# Altium PCB LegBoard.PcbDoc
Units mil, origin at the board's own origin, x right, y up, seen from the top; angles counter-clockwise.
Board outline 4000 x 2200 mil, 4 copper layers (Top Layer, Internal Plane 1, Internal Plane 2, Bottom Layer), stack 30.634 mil thick; 97 components, 72 nets, 402 pads, 149 vias.
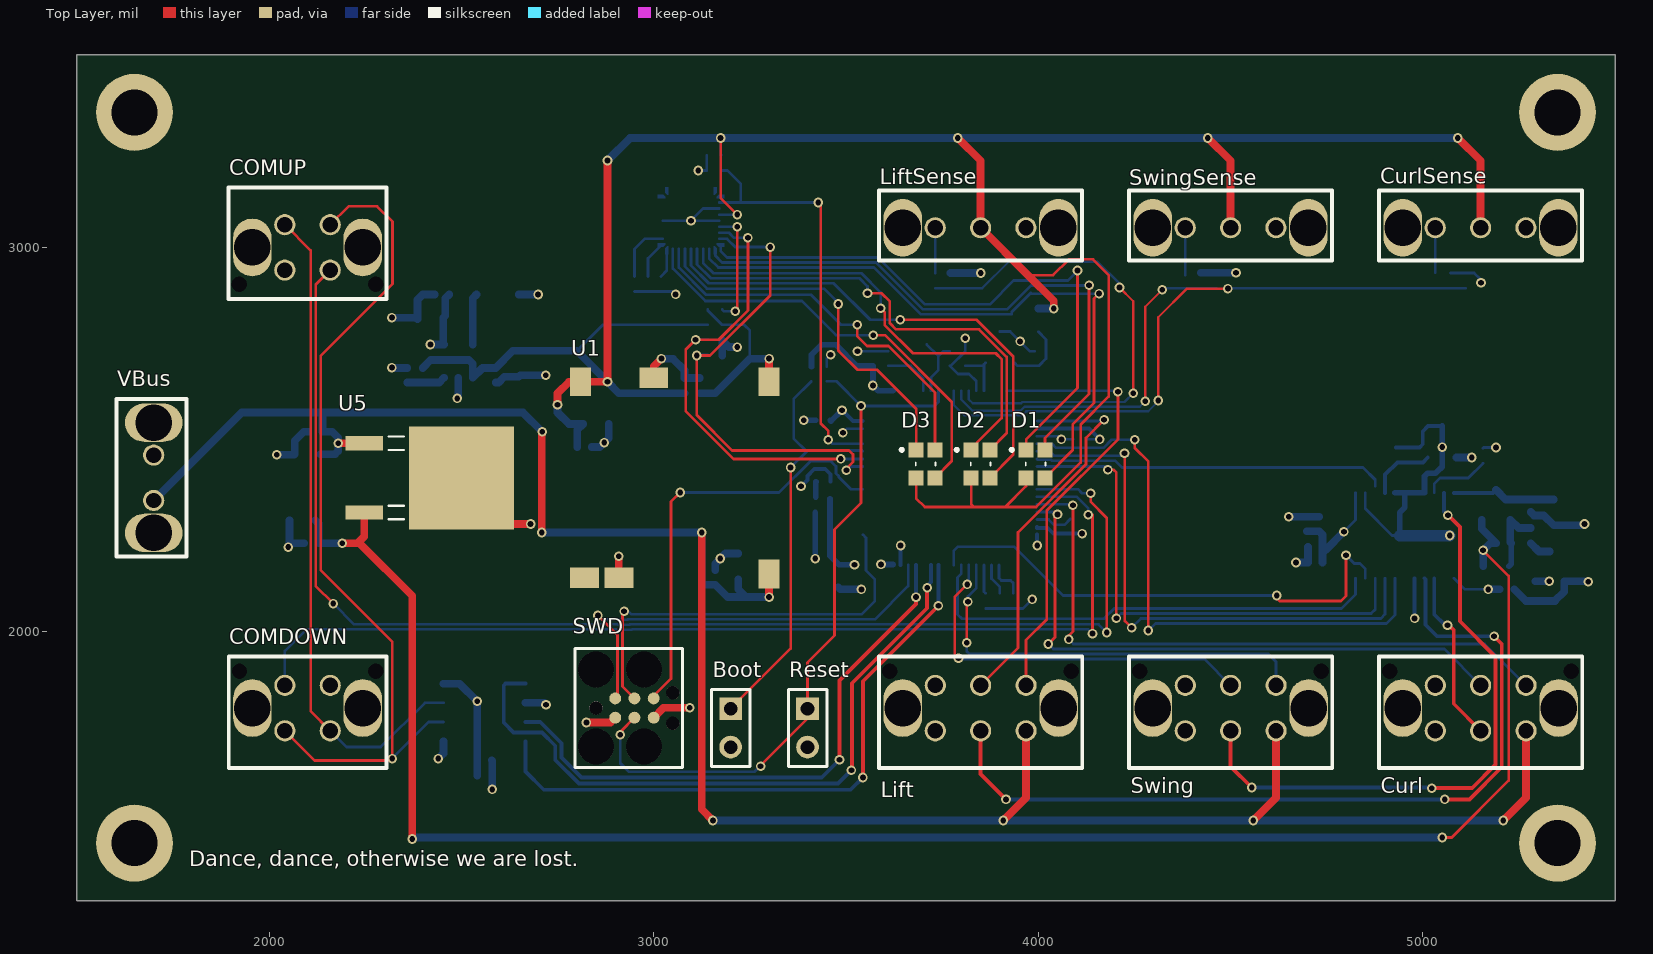
[diagram p0: Top Layer view]
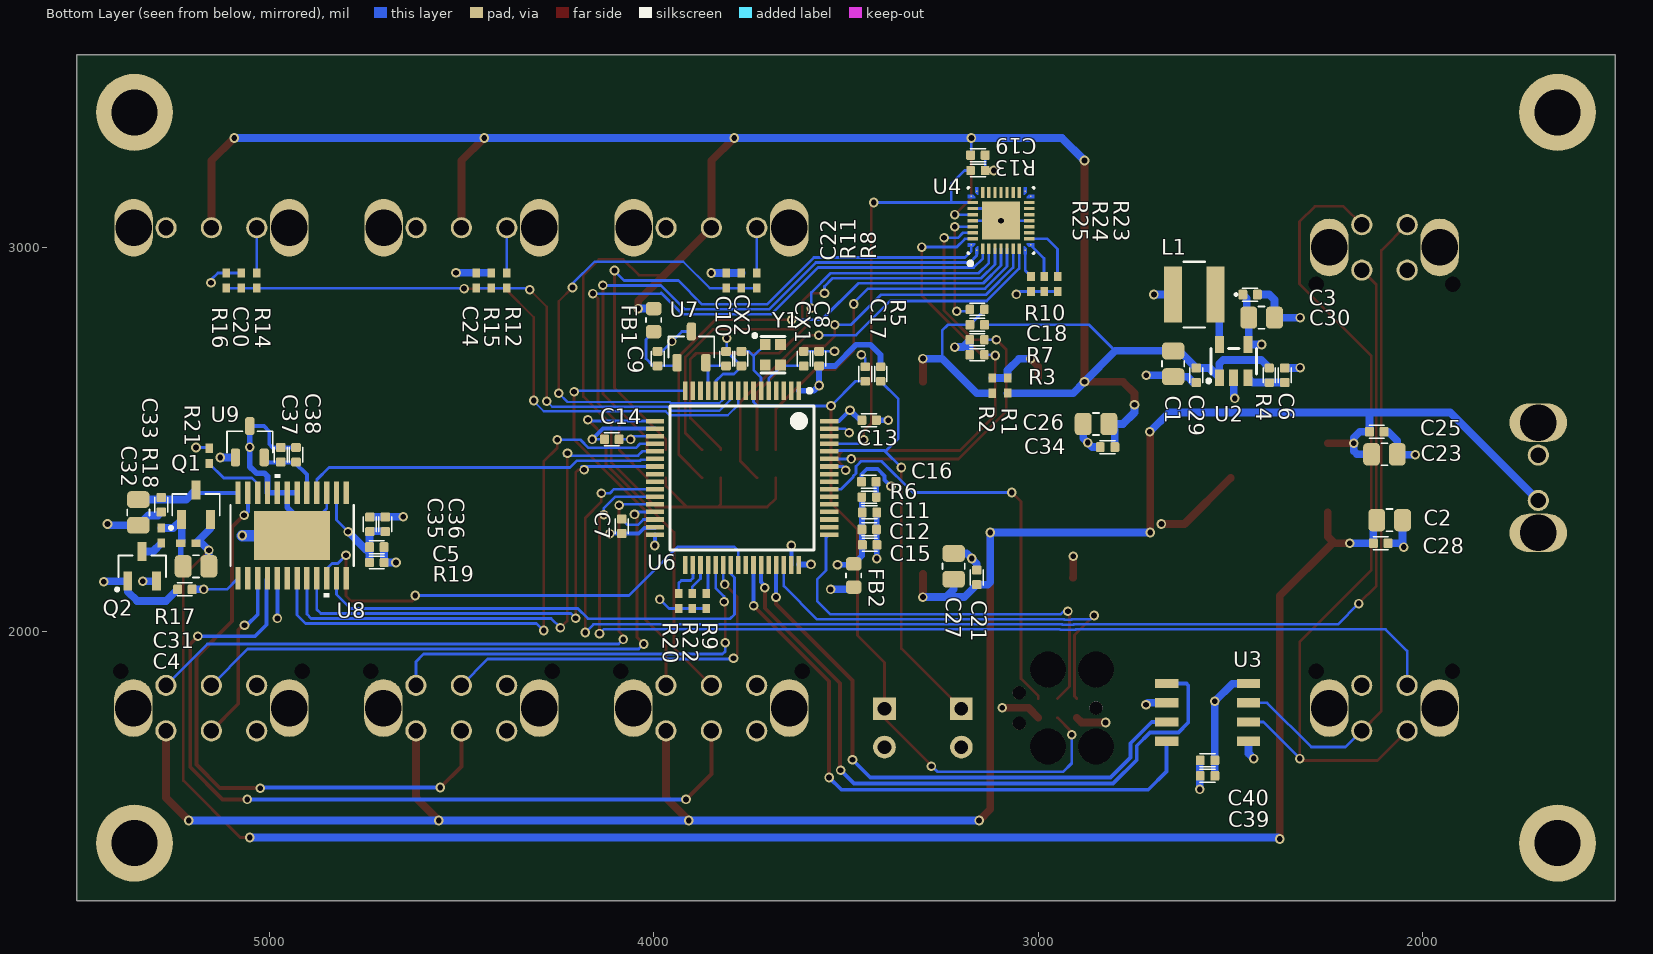
[diagram p1: Bottom Layer view, seen from below]
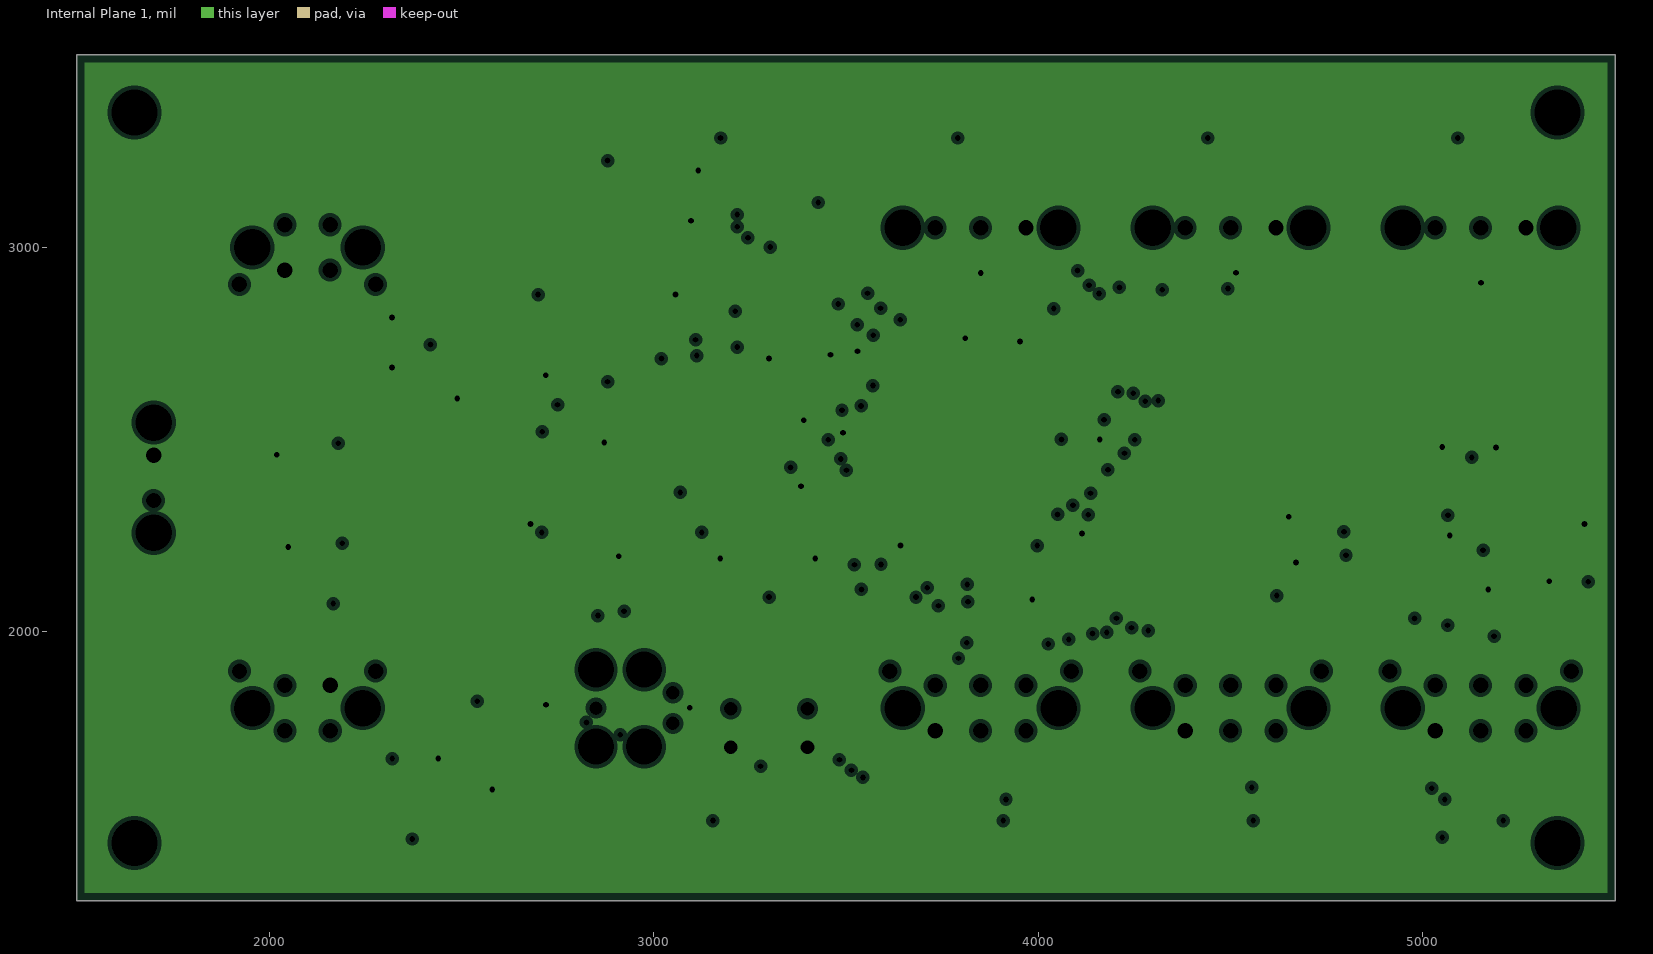
[diagram p2: Internal Plane 1, clearances drawn from the general rule]
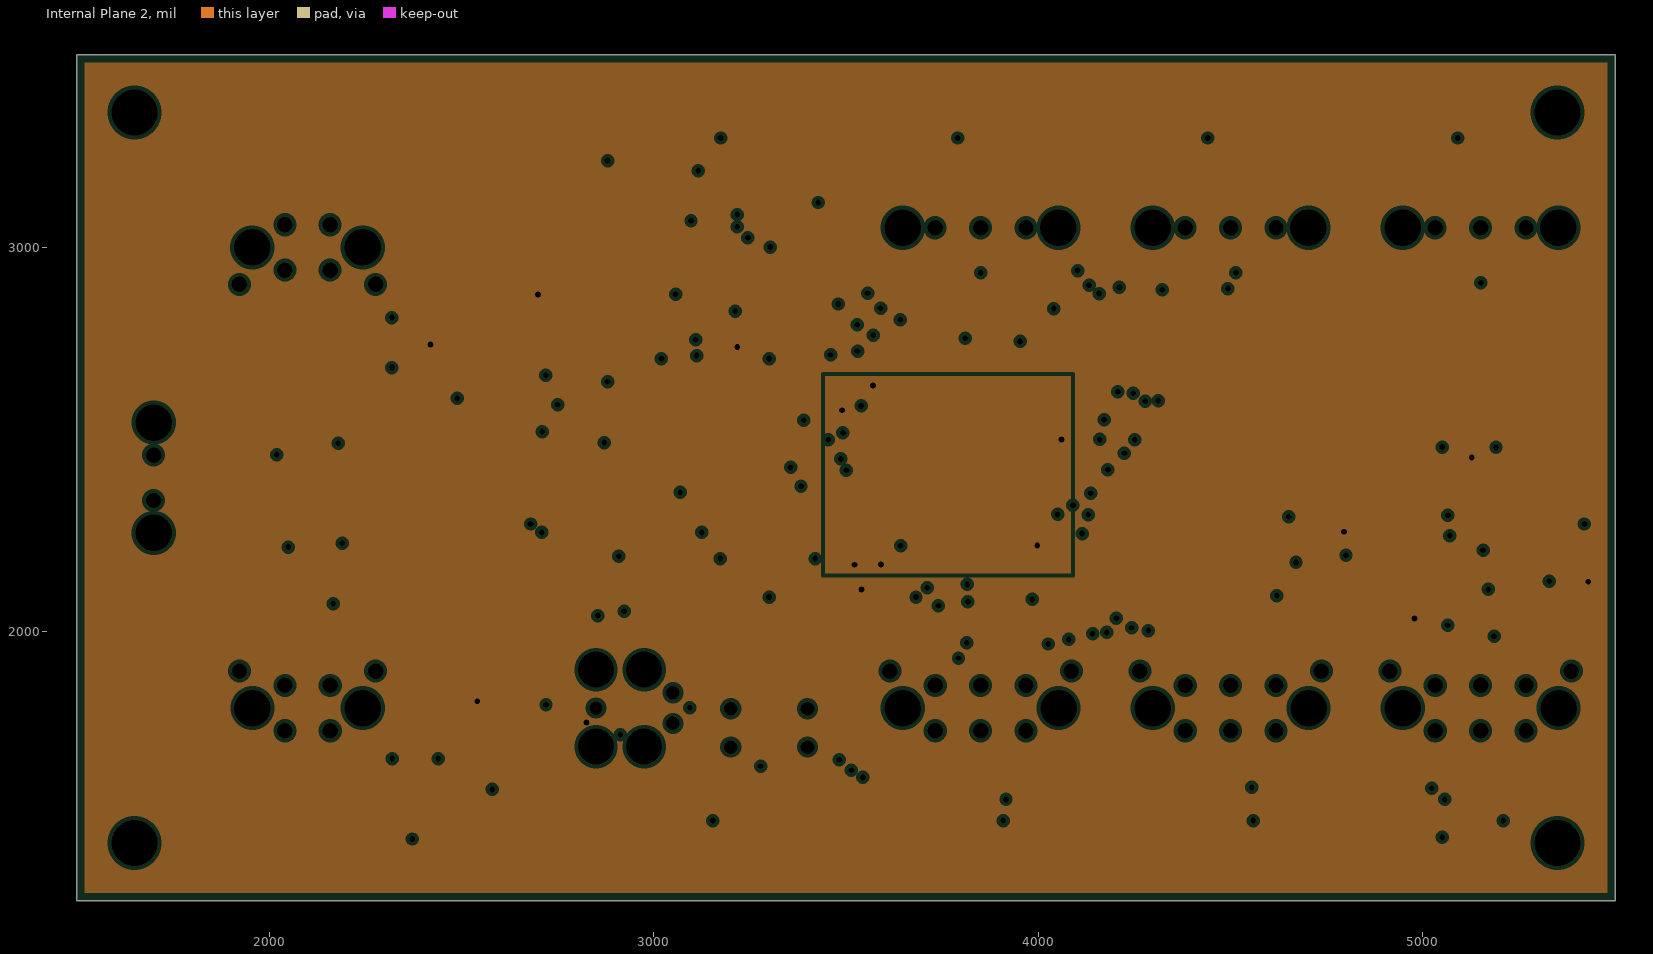
[diagram p3: Internal Plane 2, clearances drawn from the general rule]
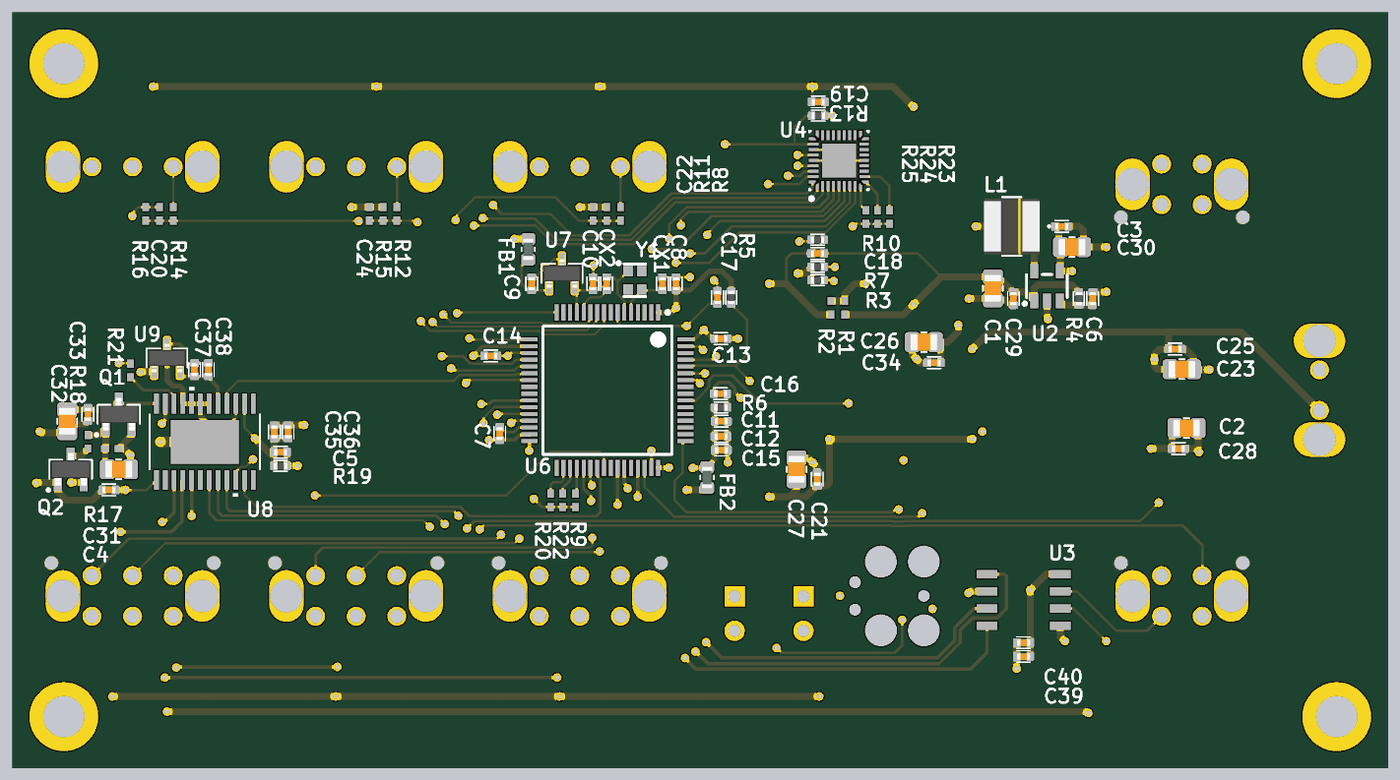
[diagram p4: 3D render of the assembled board from below, using the file's embedded part models]

## Layer stack, top to bottom
Top Solder: solder mask 0.4, Solder Resist, Dk 3.5
Top Layer: signal copper 1.4
Dielectric 1: core 10, FR-4, Dk 4.2
Internal Plane 1: plane copper 1.417, net GND
Dielectric 3: prepreg 5, Dk 4.2
Internal Plane 2: plane copper 1.417, net (Multiple Nets)
Dielectric 2: core 10, Dk 4.2
Bottom Layer: signal copper 1.4
Bottom Solder: solder mask 0.4, Solder Resist, Dk 3.5

## Board outline
1500,1300 5500,1300 5500,3500 1500,3500

## Design rules (kind name [scope] priority, off if disabled: settings)
Clearance [All] p1: gap=6 ignorepadtopadclearanceinfootprint=FALSE
HoleSize [All] p1: absolutevalues=TRUE maxlimit=1000 minlimit=1 maxpercent=80.000 minpercent=20.000
MinimumSolderMaskSliver [All] p1: minsoldermaskwidth=0
PlaneClearance [All] p1: clearance=10
PlaneConnect [All] p1: planeconnectstyle=Relief reliefexpansion=10 reliefentries=4 reliefconductorwidth=10 reliefairgap=6
PolygonConnect [All] p1: connectstyle=Relief reliefconductorwidth=10 reliefentries=4 polygonreliefangle="90 Angle" airgapwidth=10
RoutingVias [All] p1: holewidth=28 width=50 viastyle="Through Hole" minholewidth=28 minwidth=50 maxholewidth=28 maxwidth=50
SilkToSilkClearance [All] p1: silktosilkclearance=0
SilkToSolderMaskClearance [IsPad] p1: minsilkscreentomaskgap=0 clearancetoexposedcopper=TRUE
SolderMaskExpansion [All] p1: expansion=4
Width [All] p1: maxlimit=5000 minlimit=6 preferedwidth=10
24 further rules are at their usual default settings.

## Classes and differential pairs
component class uController: Boot C7 C8 C9 C10 C11 C12 C13 C14 C15 C16 C17 C39 C40 CX1 CX2 FB1 FB2 R3 R5 R6 R7 R9 R20 R22 Reset U3 U6 U7 Y1
component class Power: C1 C2 C3 C6 C21 C23 C25 C26 C27 C28 C29 C30 C34 L1 R1 R2 R4 U1 U2 U5
component class Connectors: COMDOWN COMUP Curl CurlSense Lift LiftSense SWD Swing SwingSense VBus
component class Analog: C4 C5 C20 C22 C24 C31 C32 C33 C35 C36 C37 C38 Q1 Q2 R8 R11 R12 R14 R15 R16 R17 R18 R19 R21 U8 U9
component class LEDs: C18 C19 D1 D2 D3 R10 R13 R23 R24 R25 U4

## Components (designator, comment, footprint, x,y, rotation, side; value= is the part's Value field where it differs from the comment)
Boot "Header 2" HDR1X2 3200,1800 r270 top
C1 "10uF" CAPC2012X145N 2649.4,2696.61 r270 bottom
C2 "10uF" CAPC2012X145N 2086.54,2290 r180 bottom
C3 "0.1uF" CAPC1005(0402)N 2449.4,2876.61 r0 bottom
C4 "0.1uF" CAPC1005(0402)N 5218.9,2110 r0 bottom
C5 "1uF" CAPC1005(0402)N 4720,2220 r0 bottom
C6 "1uF" CAPC1005(0402)N 2359.4,2666.61 r90 bottom
C7 "2.2uF" CAPC1005(0402)N 4083,2274 r90 bottom
C8 "0.1uF" CAPC1005(0402)N 3570,2710 r270 bottom
C9 "4.7uF" CAPC1005(0402)N 3990,2710 r270 bottom
C10 "0.1uF" CAPC1005(0402)N 3811.89,2710 r270 bottom
C11 "1uF" CAPC1005(0402)N 3438.9,2310 r0 bottom
C12 "0.1uF" CAPC1005(0402)N 3439.68,2265.75 r0 bottom
C13 "0.1uF" CAPC1005(0402)N 3440,2550 r0 bottom
C14 "0.1uF" CAPC1005(0402)N 4108.9,2500 r180 bottom
C15 "0.1uF" CAPC1005(0402)N 3438.58,2225.75 r0 bottom
C16 "4.7uF" CAPC1005(0402)N 3441.1,2390 r180 bottom
C17 "0.1uF" CAPC1005(0402)N 3450,2670 r270 bottom
C18 "0.1uF" CAPC1005(0402)N 3159.1,2798 r180 bottom
C19 "1uF" CAPC1005(0402)N 3157,3239 r0 bottom
C20 "Cap" 0402 5071.89,2913 r270 bottom value=20nF
C21 "0.1uF" CAPC1005(0402)N 3160,2141.1 r270 bottom
C22 "Cap" 0402 3811.89,2913 r270 bottom value=20nF
C23 "10uF" CAPC2012X145N 2100,2461.26 r180 bottom
C24 "Cap" 0402 4461.89,2913 r270 bottom value=20nF
C25 "0.1uF" CAPC1005(0402)N 2120,2520 r0 bottom
C26 "10uF" CAPC2012X145N 2850,2540 r0 bottom
C27 "10uF" CAPC2012X145N 3220,2170 r90 bottom
C28 "0.1uF" CAPC1005(0402)N 2110,2230 r0 bottom
C29 "0.1uF" CAPC1005(0402)N 2589.4,2666.61 r90 bottom
C30 "10uF" CAPC2012X145N 2419.4,2816.61 r180 bottom
C31 "10uF" CAPC2012X145N 5190,2170 r180 bottom
C32 "10uF" CAPC2012X145N 5340,2310 r270 bottom
C33 "0.1uF" CAPC1005(0402)N 5280,2330 r90 bottom
C34 "0.1uF" CAPC1005(0402)N 2820,2480 r180 bottom
C35 "0.1uF" CAPC1005(0402)N 4738,2279 r270 bottom
C36 "1uF" CAPC1005(0402)N 4698,2279 r270 bottom
C37 "0.1uF" CAPC1005(0402)N 4970,2460 r270 bottom
C38 "1uF" CAPC1005(0402)N 4930,2460 r270 bottom
C39 "1uF" CAPC1005(0402)N 2560,1625.35 r180 bottom
C40 "0.1uF" CAPC1005(0402)N 2560,1665.35 r180 bottom
COMDOWN "43045-0426" 43045-0426 2100.06,1801.43 r0 top
COMUP "43045-0426" 43045-0426 2099.94,2999.07 r180 top
Curl "43045-0626" 43045-0626 5150.06,1801.43 r0 top
CurlSense "043650-0320" 43650-0320 5149.89,3050.25 r180 top
CX1 "2pF" CAPC1005(0402)N 3610,2710 r270 bottom
CX2 "2pF" CAPC1005(0402)N 3771.89,2710 r90 bottom
D1 "150080M153000" *LED_150080M153000 3992.89,2436.42 r0 top
D2 "150080M153000" *LED_150080M153000 3849.89,2436.42 r0 top
D3 "150080M153000" *LED_150080M153000 3706.89,2436.42 r0 top
FB1 "600ohms@100MHz" INDC1608X100N 4000,2810 r90 bottom
FB2 "600ohms@100MHz" INDC1608X100N 3480,2146.07 r270 bottom
L1 "2.2uH" IND_TAIYO_NRS401 2594.4,2876.61 r0 bottom
Lift "43045-0626" 43045-0626 3850.06,1801.43 r0 top
LiftSense "043650-0320" 43650-0320 3849.89,3050.25 r180 top
Q1 "ZXMP6A13FTA" *SOT95P230X110-3P 5190,2330 r270 bottom
Q2 "NX7002AK,215" *SOT95P230X110-3N 5330,2170 r90 bottom
R1 "Res1" 0402 3080,2640 r270 bottom value=10K
R2 "Res1" 0402 3120,2639.69 r90 bottom value=10K
R3 "10K" RESC1005(0402)N 3159,2720 r0 bottom
R4 "10K" RESC1005(0402)N 2399.4,2666.61 r90 bottom
R5 "10K" RESC1005(0402)N 3410,2670 r90 bottom
R6 "2R2" RESC1005(0402)N 3440,2350 r0 bottom
R7 "10K" RESC1005(0402)N 3159,2759 r0 bottom
R8 "Res1" 0402 3731.89,2913 r90 bottom value=1K
R9 "Res1" 0402 3863,2080 r270 bottom value=10K
R10 "7.68K" RESC1005(0402)N 3159.1,2838 r0 bottom
R11 "Res1" 0402 3771.89,2913 r270 bottom value=2k
R12 "Res1" 0402 4381.89,2913 r90 bottom value=1K
R13 "10k" RESC1005(0402)N 3157,3199 r0 bottom
R14 "Res1" 0402 5031.89,2913 r90 bottom value=1K
R15 "Res1" 0402 4421.89,2913 r270 bottom value=2k
R16 "Res1" 0402 5111.89,2913 r270 bottom value=2k
R17 "Res1" 0402 5210,2230 r180 bottom value=1k
R18 "Res1" 0402 5280,2250 r90 bottom value=1K
R19 "10K" RESC1005(0402)N 4720,2180 r0 bottom
R20 "Res1" 0402 3935,2080 r270 bottom value=10K
R21 "Res1" 0402 5156,2457.32 r270 bottom value=10K
R22 "Res1" 0402 3900,2080 r270 bottom value=10K
R23 "Res1" 0402 2950,2904 r90 bottom value=10K
R24 "Res1" 0402 2985,2904 r90 bottom value=10K
R25 "Res1" 0402 3019,2904 r90 bottom value=10K
Reset "Header 2" HDR1X2 3400,1800 r270 top
SWD "TC2030-IDC" TC2030-MCP 2850,1801.43 r0 top
Swing "43045-0626" 43045-0626 4500.06,1801.43 r0 top
SwingSense "043650-0320" 43650-0320 4499.89,3050.25 r180 top
U1 "MTC1S2405MC-R13" MTC1S2405MC-R13 3300,2150 r90 top
U2 "SC189ZSKTRT" SOT23-5 2529.4,2660 r180 bottom
U3 "THVD1450DR" SOIC8 2560,1790 r180 bottom
U4 "IS31FL3235A-QFLS2-TR" QFN40P400X400X80_HS-37N 3097,3068.68 r90 bottom
U5 "MC78M15CDTG" DPAK-3 2500,2399.84 r270 top value=Value
U6 "STM32F730R8T6" STM-LQFP64_V 3770,2400 r90 bottom
U7 "NCP51460" SOT95P237X111-3N 3901.89,2740 r180 bottom
U8 "AD5724AREZ" RE_24 4940,2250 r90 bottom value=Value
U9 "ISL21010CFH325Z-TK" SOT95P237X111-3N 5050,2493.78 r180 bottom
VBus "043650-0220" 43650-0220 1700,2400.19 r270 top
Y1 "XRCGB25M000F3M00R0" XTAL2x1.6-XRCGB 3690,2720 r270 bottom value=25MHz

## Footprints (in the part's own frame and the unit in brackets; to place one, negate y for a bottom-side part, rotate by r counter-clockwise, add the part's x,y. Pads: shape width x height; smd on the part's side, far side on the other; paste and mask are expansions set on the pad)
0402 [mm] "Chip Capacitor, Body 1.0x0.5mm, IPC High Density"
  rect 0.6x0.5 smd: 1(-0.5,0) 2(0.5,0)
  body extent -0.55,-0.3 0.55,0.3, height 1.3
43045-0426 [mil]
  round 55 hole 40: 1(59,-59.06) 2(-59,-59.06) 3(59,59.06) 4(-59,59.06)
  round 0 hole 40: None(-177,96) None(177,96)
  oval 100x150 hole 95: None(-143.5,0) None(143.5,0)
  silkscreen extent -205,-156 205,134
43045-0626 [mil]
  round 55 hole 40: 1(118.06,-59.06) 2(0.06,-59.06) 3(-117.94,-59.06) 4(118.06,59.06) 5(0.06,59.06) 6(-117.94,59.06)
  round 0 hole 40: None(-236.05,96) None(236.06,96)
  oval 100x150 hole 95: None(-202.55,0) None(202.56,0)
  silkscreen extent -264,-156 264,134
43650-0220 [mil]
  round 55 hole 40: 1(59,0) 2(-59,0)
  oval 100x150 hole 95: None(-143.5,0) None(143.5,0)
  silkscreen extent -205,-97 205,85
43650-0320 [mil]
  round 55 hole 40: 1(118,0) 2(0,0) 3(-118,0)
  oval 100x150 hole 95: None(-202.5,0) None(202.5,0)
  silkscreen extent -264,-97 264,85
*LED_150080M153000 [mm]
  rect 1x1 smd: 1(-0.625,0.925) 2(0.625,0.925) 3(0.625,-0.925) 4(-0.625,-0.925)
  silkscreen extent -1.67,-0.11 0.65,1.02
*SOT95P230X110-3N [mm]
  rect 1.26x0.59 smd: 1(-0.98,0.95) 2(-0.98,-0.95) 3(0.98,0)
  silkscreen extent -1.62,-1.57 0.7,1.75, body extent -1.2,-1.45 1.2,1.45, height 1.11
*SOT95P230X110-3P [mm]
  rect 1.26x0.59 smd: 1(0.98,-0.95) 2(-0.98,0) 3(0.98,0.95)
  silkscreen extent -0.7,-1.75 1.62,1.57, body extent -1.2,-1.45 1.2,1.45, height 1.11
CAPC1005(0402)N [mm] "Chip capacitor, 1005(0402), Nominal clearance, IPC-7351"
  rrect30% 0.59x0.64 smd mask+0.038: 1(-0.48,0) 2(0.48,0)
  silkscreen extent -0.5,-0.43 0.5,0.43, body extent -0.5,-0.25 0.5,0.25, height 0.7
CAPC2012X145N [mm] "Capacitor, Chip; 2.00 mm L X 1.25 mm W X 1.45 mm H body"
  rrect45% 1.11x1.47 smd: 1(-0.85,0) 2(0.85,0)
  silkscreen extent -0.2,-0.73 0.2,0.73, body extent -1,-0.63 1,0.63, height 1.45
DPAK-3 [mil]
  rect 37x98 smd: 1(-90.16,-252.5) 3(90.16,-252.5)
  rect 267x273 smd: 2(0,0)
  silkscreen extent -108,-190 108,-150, body extent 0,0 10,10, height 10
HDR1X2 [mm] "Connector; Header; 2 Position"
  rect 1.5x1.5 hole 0.9: 1(0,0)
  round 1.5 hole 0.9: 2(2.54,0)
  silkscreen extent -1.27,-1.27 3.81,1.27
IND_TAIYO_NRS401 [mil]
  rect 47x146 smd paste+0 mask+0: 1(-55,0) 2(55,0)
  silkscreen extent -111,-86 28,86, body extent -81,-81 81,81, height 71
INDC1608X100N [mm] "Inductor, Chip; 1.60 mm L X 0.80 mm W X 1.00 mm H body"
  rrect49% 0.89x1.02 smd: 1(-0.765,0) 2(0.765,0)
  silkscreen extent -0.14,-0.5 0.14,0.5, body extent -0.8,-0.4 0.8,0.4, height 1
MTC1S2405MC-R13 [mil]
  rect 75x54 smd: 1(0,0) 2(500,0) 4(500,490)
  rect 54x75 smd: 3(510,300) 5(-10,480) 6(-10,390)
  body extent -42,-31 542,522, height 442
QFN40P400X400X80_HS-37N [mm] "QFN, 36-Leads, Body 4.00x4.00mm, Pitch 0.40mm, Thermal Pad 3.46x3.46mm, IPC Medium Density"
  rect 0.1x0.1 smd: 1(-1.955,1.6) 9(-1.955,-1.6) 10(-1.6,-1.955) 18(1.6,-1.955) 19(1.955,-1.6) 27(1.955,1.6) 28(1.6,1.955) 36(-1.6,1.955)
  rect 0.7x0.22 smd: 2(-1.86,1.2) 3(-1.86,0.8) 4(-1.86,0.4) 5(-1.86,0) 6(-1.86,-0.4) 7(-1.86,-0.8) 8(-1.86,-1.2) 20(1.86,-1.2) 21(1.86,-0.8) 22(1.86,-0.4) 23(1.86,0) 24(1.86,0.4) 25(1.86,0.8) 26(1.86,1.2)
  rect 0.22x0.7 smd: 11(-1.2,-1.86) 12(-0.8,-1.86) 13(-0.4,-1.86) 14(0,-1.86) 15(0.4,-1.86) 16(0.8,-1.86) 17(1.2,-1.86) 29(1.2,1.86) 30(0.8,1.86) 31(0.4,1.86) 32(0,1.86) 33(-0.4,1.86) 34(-0.8,1.86) 35(-1.2,1.86)
  rect 2.51x2.51 smd: 37(0,0)
  Top Layer region: 1.7,1.49 1.7,1.58 1.83,1.71 2.21,1.71 2.21,1.49
  Top Layer region: 1.49,1.7 1.49,2.21 1.71,2.21 1.71,1.83 1.58,1.7
  Top Layer region: 1.7,-1.58 1.7,-1.49 2.2,-1.49 2.2,-1.71 1.83,-1.71
  Top Layer region: 1.49,-2.21 1.71,-2.21 1.71,-1.83 1.58,-1.7 1.49,-1.7
  Top Layer region: -1.71,1.83 -1.71,2.21 -1.49,2.21 -1.49,1.7 -1.58,1.7
  Top Layer region: -2.21,1.49 -1.7,1.49 -1.7,1.58 -1.83,1.71 -2.21,1.71
  Top Layer region: -2.21,-1.71 -2.21,-1.49 -1.7,-1.49 -1.7,-1.58 -1.83,-1.71
  Top Layer region: -1.71,-2.21 -1.49,-2.21 -1.49,-1.7 -1.58,-1.7 -1.71,-1.83
  silkscreen extent -2.95,-2.18 2.18,2.18, body extent -2.02,-2.03 2.03,2.03, height 0.8
RE_24 [mil]
  rect 58x14 smd: 1(-111,140.75) 2(-111,115.16) 3(-111,89.57) 4(-111,63.98) 5(-111,38.39) 6(-111,12.8) 7(-111,-12.8) 8(-111,-38.39) 9(-111,-63.98) 10(-111,-89.57) 11(-111,-115.16) 12(-111,-140.75) 13(111,-140.75) 14(111,-115.16) 15(111,-89.57) 16(111,-63.98) 17(111,-38.39) 18(111,-12.8) 19(111,12.8) 20(111,38.39) 21(111,63.98) 22(111,89.57) 23(111,115.16) 24(111,140.75)
  rect 128x198 smd: 25(0,0)
  silkscreen extent -160,-160 160,160, body extent 0,0 10,10, height 10
RESC1005(0402)N [mm]
  rrect30% 0.57x0.62 smd mask+0.038: 1(-0.48,0) 2(0.48,0)
  silkscreen extent -0.5,-0.4 0.5,0.4, body extent -0.5,-0.25 0.5,0.25, height 0.4
SOIC8 [mil]
  rect 61x24 smd: 1(-106.5,75) 2(-106.5,25) 3(-106.5,-25) 4(-106.5,-75) 5(106.5,-75) 6(106.5,-25) 7(106.5,25) 8(106.5,75)
SOT23-5 [mm]
  rect 0.6x1.1 smd: 1(0,0) 2(0.95,0) 3(1.9,0) 4(1.9,2.2) 5(0,2.2)
  silkscreen extent -0.8,-0.3 2.45,1.95, body extent -0.6,0.2 2.5,2, height 1.45
SOT95P237X111-3N [mm] "Small Outline Transistor (SOT23), 0.95 mm pitch; 3 pin, 2.90 mm L X 1.30 mm W X 1.11 mm H body"
  rrect52% 0.62x1.18 smd paste-0.1 mask+0.1: 1(-0.95,-1.035) 2(0.95,-1.035) 3(0,1.035)
  silkscreen extent -1.51,-0.7 1.51,0.7, body extent -1.39,-1.05 1.39,1.05, height 1.11
STM-LQFP64_V [mm]
  rect 1.2x0.3 smd: 1(5.75,-3.75) 2(5.75,-3.25) 3(5.75,-2.75) 4(5.75,-2.25) 5(5.75,-1.75) 6(5.75,-1.25) 7(5.75,-0.75) 8(5.75,-0.25) 9(5.75,0.25) 10(5.75,0.75) 11(5.75,1.25) 12(5.75,1.75) 13(5.75,2.25) 14(5.75,2.75) 15(5.75,3.25) 16(5.75,3.75) 33(-5.75,3.75) 34(-5.75,3.25) 35(-5.75,2.75) 36(-5.75,2.25) 37(-5.75,1.75) 38(-5.75,1.25) 39(-5.75,0.75) 40(-5.75,0.25) 41(-5.75,-0.25) 42(-5.75,-0.75) 43(-5.75,-1.25) 44(-5.75,-1.75) 45(-5.75,-2.25) 46(-5.75,-2.75) 47(-5.75,-3.25) 48(-5.75,-3.75)
  rect 0.3x1.2 smd: 17(3.75,5.75) 18(3.25,5.75) 19(2.75,5.75) 20(2.25,5.75) 21(1.75,5.75) 22(1.25,5.75) 23(0.75,5.75) 24(0.25,5.75) 25(-0.25,5.75) 26(-0.75,5.75) 27(-1.25,5.75) 28(-1.75,5.75) 29(-2.25,5.75) 30(-2.75,5.75) 31(-3.25,5.75) 32(-3.75,5.75) 49(-3.75,-5.75) 50(-3.25,-5.75) 51(-2.75,-5.75) 52(-2.25,-5.75) 53(-1.75,-5.75) 54(-1.25,-5.75) 55(-0.75,-5.75) 56(-0.25,-5.75) 57(0.25,-5.75) 58(0.75,-5.75) 59(1.25,-5.75) 60(1.75,-5.75) 61(2.25,-5.75) 62(2.75,-5.75) 63(3.25,-5.75) 64(3.75,-5.75)
  silkscreen extent -4.75,-4.75 5.87,4.75, body extent -5,-5 5,5, height 1.6
TC2030-MCP [mil]
  round 31 smd: 1(50,-25) 2(50,25) 3(100,-25) 4(100,25) 5(150,-25) 6(150,25)
  round 34 hole 35 unplated: A(0,0) B(200,40) C(200,-40)
  round 92 hole 93 unplated: D(0,-100) E(125,-100) F(0,100) G(125,100)
  silkscreen extent -55,-155 225,155
XTAL2x1.6-XRCGB [mm]
  rect 0.75x0.7 smd: 1(-0.675,-0.5) 2(0.675,-0.5) 3(0.675,0.5) 4(-0.675,0.5)
  silkscreen extent -1.36,-1.3 1.2,0.8, body extent -1,-0.8 1,0.8, height 0.65

## Part data
Boot Reset: "Header, 2-Pin", DNP=DNP, LatestRevisionDate=17-Jul-2002, LatestRevisionNote="Re-released for DXP Platform.", Publisher="Altium Limited"
C1 C2 C23 C26 C27 C30 C31 C32: library part CAP, "CAP", Manufacturer 1=Samsung, Manufacturer Part Number 1=GRM21BC8YA106ME11L, Operating Temperature="-55°C ~ 85°C", Package / Case="0805 (2012 Metric)", Tolerance=±10%, Voltage - Rated=35V, Capacitance=10uF, Category=Capacitors, Level=1, Mounting Type="Surface Mount, MLCC", RoHS="RoHS Compliant", Size / Dimension="0.039\" L x 0.020\" W (1.00mm x 0.50mm)", Thickness (Max)="0.022\" (0.55mm)", Vendor PN=490-10505-1-ND
C3 C4 C10 C12 C13 C14 C15 C17 C18 C29 C34 C35 C37 C40: library part CAP, "CAP CER 0.1UF 16V X5R 0402", Manufacturer 1=Murata, Manufacturer Part Number 1=GRM155R61C104KA88D, Operating Temperature="-55°C ~ 85°C", Package / Case="0402 (1005 Metric)", Temperature Coefficient=X5R, Tolerance=±10%, Voltage - Rated=16V, Capacitance=0.1uF, Category=Capacitors, Level=1, Mounting Type="Surface Mount, MLCC", RoHS="RoHS Compliant", Size / Dimension="0.039\" L x 0.020\" W (1.00mm x 0.50mm)", Thickness (Max)="0.022\" (0.55mm)", Vendor PN=490-5415-1-ND
C5 C6 C19 C36 C38: library part CAP, "CAP", Manufacturer 1=Samsung, Manufacturer Part Number 1=CL05A105KO5NNNC, Operating Temperature="-55°C ~ 85°C", Package / Case="0402 (1005 Metric)", Temperature Coefficient=X5R, Tolerance=±10%, Voltage - Rated=16V, Capacitance=1uF, Category=Capacitors, Level=1, Mounting Type="Surface Mount, MLCC", RoHS="RoHS Compliant", Size / Dimension="0.039\" L x 0.020\" W (1.00mm x 0.50mm)", Thickness (Max)="0.022\" (0.55mm)"
  C5 C19 C36 C38: Vendor PN=1276-1067-1-ND
  C6: DNP=DNP
C7: library part CAP, "CAP", Manufacturer 1=Murata, Manufacturer Part Number 1=GRM155R61A225KE95D, Operating Temperature="-55°C ~ 85°C", Package / Case="0402 (1005 Metric)", Temperature Coefficient=X5R, Tolerance=±10%, Voltage - Rated=10V, Capacitance=2.2uF, Category=Capacitors, Level=1, Mounting Type="Surface Mount, MLCC", RoHS="RoHS Compliant", Size / Dimension="0.039\" L x 0.020\" W (1.00mm x 0.50mm)", Thickness (Max)="0.022\" (0.55mm)", Vendor PN=490-10451-1-ND
C8: library part CAP, "CAP", Manufacturer 1=Murata, Manufacturer Part Number 1=GRM155R61C104KA88D, Operating Temperature="-55°C ~ 85°C", Package / Case="0402 (1005 Metric)", Temperature Coefficient=X5R, Tolerance=±10%, Voltage - Rated=16V, Capacitance=0.1uF, Category=Capacitors, Level=1, Mounting Type="Surface Mount, MLCC", RoHS="RoHS Compliant", Size / Dimension="0.039\" L x 0.020\" W (1.00mm x 0.50mm)", Thickness (Max)="0.022\" (0.55mm)", Vendor PN=490-5415-1-ND
C9 C16: library part CAP, "CAP", Manufacturer 1=Murata, Manufacturer Part Number 1=GRM155R61A475MEAAD, Operating Temperature="-55°C ~ 85°C", Package / Case="0402 (1005 Metric)", Temperature Coefficient=X5R, Tolerance=±10%, Voltage - Rated=10V, Capacitance=4.7uF, Category=Capacitors, Level=1, Mounting Type="Surface Mount, MLCC", RoHS="RoHS Compliant", Size / Dimension="0.039\" L x 0.020\" W (1.00mm x 0.50mm)", Thickness (Max)="0.022\" (0.55mm)", Vendor PN=490-14306-1-ND
C11 C39: library part CAP, "CAP", Manufacturer 1=Samsung, Manufacturer Part Number 1=CL05A105KO5NNNC, Operating Temperature="-55°C ~ 85°C", Package / Case="0402 (1005 Metric)", Tolerance=±10%, Voltage - Rated=16V, Capacitance=1uF, Category=Capacitors, Level=1, Mounting Type="Surface Mount, MLCC", RoHS="RoHS Compliant", Size / Dimension="0.039\" L x 0.020\" W (1.00mm x 0.50mm)", Thickness (Max)="0.022\" (0.55mm)", Vendor PN=1276-1067-1-ND
C20 C22 C24: "Capacitor", Voltage - Rated=50V, LatestRevisionDate=17-Jul-2002, LatestRevisionNote="Re-released for DXP Platform.", PackageDescription="Radial Cap, Thru-Hole; 2 Leads; 0.3 in Pin Spacing", PackageReference=RAD-0.3, Published=8-Jun-2000, Publisher="Altium Limited", Vendor PN=478-10122-1-ND
C21 C25 C28 C33: library part CAP, "CAP CER 0.1UF 16V X5R 0402", Manufacturer 1=Murata, Manufacturer Part Number 1=GRM155R71H104KE14J, Operating Temperature="-55°C ~ 85°C", Package / Case="0402 (1005 Metric)", Temperature Coefficient=X5R, Tolerance=±10%, Voltage - Rated=50V, Capacitance=0.1uF, Category=Capacitors, Level=1, Mounting Type="Surface Mount, MLCC", RoHS="RoHS Compliant", Size / Dimension="0.039\" L x 0.020\" W (1.00mm x 0.50mm)", Thickness (Max)="0.022\" (0.55mm)", Vendor PN=490-13342-1-ND
COMDOWN COMUP: library part "Header 2X2", "Header, 2-Pin, Dual row", LatestRevisionDate=17-Jul-2002, LatestRevisionNote="Re-released for DXP Platform.", Publisher="Altium Limited", Vendor PN=WM10681-ND
Curl Lift Swing: library part "Header 3X2", "Header, 3-Pin, Dual row", LatestRevisionDate=17-Jul-2002, LatestRevisionNote="Re-released for DXP Platform.", Publisher="Altium Limited", Vendor PN=WM10690-ND
CurlSense LiftSense SwingSense: library part "Header 3", "Header, 3-Pin", LatestRevisionDate=17-Jul-2002, LatestRevisionNote="Re-released for DXP Platform.", Publisher="Altium Limited", Vendor PN=WM7499-ND
CX1 CX2: library part CAP, "CAP C0G/NP0", Manufacturer 1=Yageo, Manufacturer Part Number 1=CC0402CRNPO9BN2R0, Operating Temperature="-55°C ~ 85°C", Package / Case="0402 (1005 Metric)", Temperature Coefficient=X5R, Tolerance=±10%, Voltage - Rated=50V, Capacitance=2pF, Category=Capacitors, Level=1, Mounting Type="Surface Mount, MLCC", RoHS="RoHS Compliant", Size / Dimension="0.039\" L x 0.020\" W (1.00mm x 0.50mm)", Thickness (Max)="0.022\" (0.55mm)", Vendor PN=311-1006-1-ND
D1 D2 D3: "Red, Green, Blue _RGB_ 624nm Red, 525nm Green, 470nm Blue LED Indication - Discrete 2V Red, 3.3V Green, 3.3V Blue 4-SMD, No Lead", Package="SMD-4 Würth Elektronik", Availability=Unavailable, MF="Wurth Electronics", MP=150080M153000, Price=None, SnapEDA_Link=https://www.snapeda.com/parts/150080M153000/Wurth%20Electronics%20Inc./view-part/2747771/?ref=snap, Vendor PN=732-11392-1-ND
FB1 FB2: library part IND-FERRITE, "Inductor, ferrite bead, 1608", Case/Package=0603, Case Code (Metric)=1608, DC Resistance (DCR)=150mR, Manufacturer 1=Murata, Manufacturer Part Number 1=BLM18KG601SN1D, Max DC Current=1.3A, Package / Case="0603 (1608 Metric)", Test Frequency=100MHz, Tolerance=20%, Category=inductors, Composition=ferrite, Impedance=600ohms@100MHz, Lead Free="Lead Free", Termination=SMD/SMT, Vendor PN=490-5258-1-ND
L1: library part IND, "Inductor, fixed, 2.2UH 1.5A 98 MOHM SMD", Case Code (Metric)=4012, DC Resistance (DCR)=60mR, Manufacturer 1="Taiyo Yuden", Manufacturer Part Number 1=NRS4012T2R2MDGJ, Max DC Current=1.9A, Max Operating Temperature=105°C, Min Operating Temperature=-40°C, Package Quantity=2000, Saturation Current=1.65A, Test Frequency=1MHz, Tolerance=20%, Category=inductors, Composition=Wirewound, Depth=4mm, Height=1.2mm, Inductance=2.2uH, Lead Free="Lead Free", Length=4mm, Radiation Hardening=No, Shielding=Shielded, Termination=SMD/SMT, Vendor PN=587-2882-1-ND, Width=4mm
Q1: library part RZM001P02T2L, "MOSFET P-CH 20V 0.1A VMT3", Manufacturer 1="Diodes Inc", Category=MOSFETs, ComponentLink1Description=Datasheet, ComponentLink1URL=https://www.rohm.com/datasheet/RZM001P02/rzm001p02t2l-e, Manufacturer Part Number 1=ZXMP6A13FTA, Vendor PN=ZXMP6A13FCT-ND
Q2: library part NX7002AKVL, "MOSFET 60 V, Single N-chan Trench", Manufacturer 1=Nexperia, Category=MOSFETs, ComponentLink1Description=Datasheet, ComponentLink1URL=https://assets.nexperia.com/documents/data-sheet/NX7002AK.pdf, Manufacturer Part Number 1=NX7002AK,215, Vendor PN=1727-1289-1-ND
R1 R2 R8 R9 R11 R12 R14 R15 R16 R17 R18 R20 R21 R22 R23 R24 R25: "Resistor", LatestRevisionDate=17-Jul-2002, LatestRevisionNote="Re-released for DXP Platform.", PackageDescription="Axial Device, Thru-Hole; 2 Leads; 0.3 in Pin Spacing", PackageReference=AXIAL-0.3, Published=8-Jun-2000, Publisher="Altium Limited"
  R1 R2 R21 R23 R24 R25: DNP=DNP, Vendor PN=311-10.0KLRCT-ND
  R8 R12 R14 R17 R18: Vendor PN=311-1.00KLRCT-ND
  R9 R20 R22: DNP=DNP, Vendor PN=RMCF0402FT10K0CT-ND
  R11 R15 R16: Vendor PN=311-2KLRCT-ND
R3 R4 R5 R7 R13 R19: library part RES, "Resistor, Chip", Manufacturer 1=Stackpole, Manufacturer Part Number 1=RMCF0402FT10K0, Package / Case="0402 (1005 Metric)", Power (Watts)=-, Category=Resistors, Composition=-, Level=1, Number of Terminations=2, Temperature Coefficient=-, Tolerance=-, Vendor PN=RMCF0402FT10K0CT-ND
  R3 R4 R5 R7 R19: Resistance=10K
  R13: Resistance=10k
R6: library part RES, "Resistor, Chip", Manufacturer 1=Stackpole, Manufacturer Part Number 1=RMCF0402FT2R20, Package / Case="0402 (1005 Metric)", Power (Watts)=-, Category=Resistors, Composition=-, Level=1, Number of Terminations=2, Resistance=2R2, Temperature Coefficient=-, Tolerance=-, Vendor PN=RMCF0402FT2R20CT-ND
R10: library part RES, "Resistor, Chip", Manufacturer 1=Stackpole, Manufacturer Part Number 1=RMCF0402FT7K68, Package / Case="0402 (1005 Metric)", Power (Watts)=-, Category=Resistors, Composition=-, Level=1, Number of Terminations=2, Resistance=7.68K, Temperature Coefficient=-, Tolerance=-, Vendor PN=RMCF0402FT7K68CT-ND
SWD: "Connector, Pogo-Pin, ARM Cortex", Manufacturer 1=Tag-Connect, Category=Connectors, DNP=DNP, Manufacturer Part Number 1=TC2030-IDC
U2: library part VREG-DCDC-SC189, "IC, Buck Converter, SC189ZSKTRT", Manufacturer 1=Semtech, Category=ICs, Manufacturer Part Number 1=SC189ZSKTRT, Vendor PN=SC189ZSKCT-ND
U4: "28 channel LED Driver", Manufacturer 1=ISSI, Manufacturer Part Number 1=IS31FL3235A-QFLS2-TR, Vendor PN=706-1588-1-ND
U5 U8: "No Description Available", RefDes=RefDes, Type=DEV
  U5: Copyright="Copyright (C) 2016 Accelerated Designs. All rights reserved", Manufacturer_Part_Number=MC78M15CDTG, Vendor="ON Semiconductor", Vendor PN=MC78M15CDTGOS-ND
  U8: Built_By=EMA_UL_Team, Copyright="Copyright (C) 2018 Accelerated Designs. All rights reserved", Manufacturer_Part_Number=AD5724AREZ, Vendor="Analog Devices Inc", Vendor PN=AD5724AREZ-REEL7CT-ND
U6: "IC, Cortex-M7 32b MCU+FPU, 462DMIPS, 64KB Flash / /256+16+4KB RAM, 64 pin LQFP", Manufacturer 1=STMicro, Category=ICs, Manufacturer Part Number 1=STM32F730R8T6, Vendor PN=497-18103-ND
VBus: library part "Header 2", "Header, 2-Pin", LatestRevisionDate=17-Jul-2002, LatestRevisionNote="Re-released for DXP Platform.", Publisher="Altium Limited", Vendor PN=WM14584-ND
Y1: library part XTAL01, "Crystal, Murata  XRCGB25M000F3M00R0", Manufacturer 1=Murata, Category="frequency control", Manufacturer Part Number 1=XRCGB25M000F3M00R0, Vendor PN=490-5578-1-ND
U1: Vendor PN=811-3081-1-ND
U3: Vendor PN=296-50395-1-ND
U7: Vendor PN=NCP51460SN33T1GOSCT-ND
U9: Vendor PN=ISL21010CFH325Z-TKCT-ND

## Free pads (board coordinates)
  round 200 hole 120: ""(1650,1450.25) ""(1650,3350.25) ""(5350,1450.25) ""(5350,3350.25)

## Via types
v1: diameter 25, hole 15, Top Layer to Bottom Layer, 149 vias

## Nets (pads, with @x,y where several pads share a name; then routed paths per layer and width w, separated by ;. In a path a pad name is that pad's centre, name@x,y a point inside that pad or via, vN(x,y) a via of type N, cw(c..) or ccw(c..) an arc to the next point about the centre after c; other vN are vias at no path point)
3V3: C3.2 C4.2 C5.2 C30.1 C35.2 C36.2 C39.2 C40.2 FB2.2 L1.2 Q2.1 R3.2 R7.2 R19.2 SWD.1 U2.4 U3.8 U8.5 U8.14 U9.1 | length 1436
  Top Layer w20: v1(2825,1764) 2887.57,1764 SWD.1
  Bottom Layer w7: v1(4794.5,2260) 4824.84,2290.34 U8.14
  Bottom Layer w10: v1(4978.39,2034.61) U8.5
  Bottom Layer w20: v1(2419.4,2746.61) U2.4 2452.87,2748.35 C30.1 2458.12,2821.87 2458.12,2866.43 C3.2 ; U3.8 2495,1865 v1(2541.1,1818.9) C40.2 C39.2 ; L1.2 v1(2699.4,2876.61) ; R3.2@3178,2718 3178,2758 3196,2740 v1(3217,2740) ; FB2.2 3485.95,2110 v1(3540,2110) ; C36.2@4698,2261.1 4730,2261.1 4738.9,2252.2 C5.2 R19.2 ; C5.2@4746.7,2212.2 v1(4794.5,2260) ; U9.1 v1(5126.97,2453.03) ; C4.2 5267.8,2080 5343.23,2080 5367.4,2104.17 Q2.1 5428.58,2131.42 v1(5430,2130)
5V0: C1.1 C18.2 C19.2 C26.1 C29.2 C34.2 CurlSense.2 D1.4 D2.4 D3.4 FB1.2 LiftSense.2 R1.2 R4.2 SwingSense.2 U1.4 U2.1 U4.31 | length 7210
  Top Layer w7: v1(3174,3283.63) 3174,3127.43 v1(3217,3084.43) ; D3.4 3682.28,2346.72 3705,2324 3833,2324 ; D2.4 3825.28,2331.72 3833,2324 ; D1.4 3968.28,2378.28 3914,2324 ; 3973.14,2927 4038.29,2927 4079.29,2968 4142,2968 4183,2927 4183,2611 4110,2538 4110,2439.7 3994.3,2324 3914,2324 ; 3833,2324 3914,2324
  Top Layer w20: v1(2750,2590) 2750,2620 2780,2650 U1.4 v1(2880,2650) v1(2880,3225) ; v1(3790.78,3283.63) 3849.89,3224.52 LiftSense.2 3973.14,2927 4040,2860.14 v1(4040,2840) ; v1(4440.78,3283.63) 4499.89,3224.52 SwingSense.2 ; v1(5090.78,3283.63) 5149.89,3224.52 CurlSense.2
  Bottom Layer w7: 2799.92,2730.08 2867.84,2798 C18.2 ; U4.31 v1(3217,3084.43) ; v1(3174,3283.63) 3174,3240.9 C19.2
  Bottom Layer w20: R4.2 2420.5,2706.61 2519.4,2706.61 2529.4,2696.61 U2.1 2554.91,2685.51 C29.2 2633.97,2730.08 C1.1 2799.92,2730.08 v1(2880,2650) 2909.69,2620.31 R1.2 ; v1(2750,2590) 2750,2570 2780,2540 C26.1 2801.1,2524.57 C34.2 ; v1(2880,3225) 2938.63,3283.63 v1(3174,3283.63) v1(3790.78,3283.63) v1(4440.78,3283.63) v1(5090.78,3283.63) ; FB1.2 4039.88,2840.12 v1(4040,2840)
16V0: C2.1 C28.2 C31.2 Q1.3 R17.2 U5.3 | length 4782.5
  Top Layer w7: v1(5050,1465) 5075,1465 5223,1613 5223,2145.07 v1(5156.54,2211.54)
  Top Layer w20: v1(2190,2230) 2230,2230 ; U5.3 2247.5,2247.5 2230,2230 ; v1(2372,1461) 2372,2093 2235,2230 2230,2230
  Bottom Layer w20: C2.1 2128.9,2281.1 C28.2 v1(2190,2230) ; v1(2372,1461) 2376,1465 v1(5050,1465) ; Q1.3 5152.6,2267.71 R17.2 5175,2230 v1(5156.54,2211.54) C31.2
16V0_SW: C32.1 C33.2 Q1.2 U8.24 | length 272.8
  Bottom Layer w10: U8.24 5182.42,2361 Q1.2
  Bottom Layer w20: Q1.2 5215.13,2343.46 C32.1
ADC1_IN11: C20.2 R14.1 R16.2 U6.9 | length 1642.3
  Top Layer w6: v1(4312,2601) 4312,2817.74 4386.26,2892 v1(4493,2892)
  Bottom Layer w6: U6.9 3779.85,2590.15 3807.45,2562.55 3958.55,2562.55 3969,2573 4286,2573 v1@4312,2599 ; v1@4493,2893.32 R14.1 C20.2 R16.2
ADC1_IN12: C24.2 R12.1 R15.2 U6.10 | length 973.2
  Top Layer w6: v1(4278,2599) 4278,2845 v1(4322,2889)
  Bottom Layer w6: U6.10 3799.53,2603.81 3828.8,2574.55 3953.58,2574.55 3964.03,2585 4264,2585 v1(4278,2599) ; v1(4322,2889) 4326.31,2893.32 R12.1
  Bottom Layer w7: R12.1 R15.2 C24.2
ADC1_IN13: C22.2 R8.1 R11.2 U6.11 | length 1296.6
  Top Layer w6: v1(4211,2895) 4247,2859 v1(4247,2620)
  Bottom Layer w6: C22.2 3854.32,2893.32 3923,2962 4154,2962 4211,2905 v1(4211,2895) ; U6.11 3819.22,2603.81 3829.27,2593.76 3848.54,2593.76 3848.74,2593.97 3848.95,2593.76 3955.82,2593.76 3959.06,2597 4224,2597 v1(4247,2620)
  Bottom Layer w7: R8.1@3731.89,2892.63 C22.2@3811.89,2892.63
C\L\R\: U6.39 U8.11 | length 1240.2
  Bottom Layer w7: U6.39 3799.53,2150.35 3790,2140.82 3790,2045 3801,2034 4170.89,2034 4197.39,2060.5 4788.5,2060.5 4824.84,2096.84 U8.11
COMMA: COMDOWN.1 COMUP.1 U3.7 | length 1724.3
  Top Layer w7: COMUP.1 2108,2991.07 2108,1793.43 COMDOWN.1
  Bottom Layer w7: COMDOWN.1 2201.43,1700 2290,1700 2405,1815 U3.7
COMMB: COMDOWN.2 COMUP.2 U3.6 | length 2234.9
  Top Layer w7: COMDOWN.2 2118.43,1665 2315,1665 v1(2320,1670) 2320,1974 2134,2160 2134,2717 2321,2904 2321,3066 2281,3106 2206.82,3106 COMUP.2
  Bottom Layer w7: v1(2320,1670) 2415,1765 U3.6
CommDownstream: COMDOWN.4 U6.27 | length 2700.7
  Top Layer w7: v1(4130,2304) 4141,2304 v1(4141,1995)
  Bottom Layer w7: COMDOWN.4 2041.06,1950.06 2097,2006 2902.12,2006 2903.12,2005 2942.88,2005 2943.88,2006 4130,2006 v1(4141,1995) ; U6.27 3996.59,2351 4099.11,2351 4130,2320.11 v1(4130,2304)
CommUpstream: COMUP.4 U6.26 | length 3468
  Top Layer w7: COMUP.4 2121,2902.07 2121,2119 v1(2167,2073) ; v1(4136,2360) 4136,2338 4178,2296 v1(4178,1998)
  Bottom Layer w7: v1(2167,2073) 2221,2019 2907.5,2019 2908.5,2018 2937.5,2018 2938.5,2019 4157,2019 v1(4178,1998) ; U6.26 4103.52,2370.48 4114,2360 v1(4136,2360)
CurlFB: Curl.2 U8.3 | length 440.9
  Top Layer w10: v1@5073,2011 5080,2004 5080,1812.49 Curl.2
  Bottom Layer w10: U8.3 5029.57,2044.43 5057,2017 v1(5064,2017)
CurlRX: Curl.5 U6.29 | length 1586.7
  Top Layer w7: v1(4026,1968) 4043.61,1985.61 4043.61,2311.61 4050,2305.21 v1(4050,2305)
  Bottom Layer w7: U6.29 4046.32,2311.42 4050,2307.74 v1(4050,2305) ; v1(4026,1968) 4039,1955 5055.6,1955 Curl.5
CurlTX: Curl.4 U6.28 | length 1690.8
  Top Layer w7: v1(4079,1980) 4074,1985 4090,2001 v1(4090,2329)
  Bottom Layer w7: U6.28 4087.89,2331.11 v1(4090,2329) ; v1(4079,1980) 4091,1968 5160.6,1968 Curl.4
DAC_DIN: U6.23 U8.9 | length 1369.7
  Top Layer w7: v1(4181,2421) 4196,2421 4203,2414 v1(4203,2035)
  Bottom Layer w7: U6.23 4187.47,2429.53 4181,2423.06 v1(4181,2421) ; v1(4203,2035) 4215.5,2047.5 4865.5,2047.5 4876.02,2058.02 U8.9
DAC_L\D\A\C\: U6.40 U8.10 | length 1324.3
  Top Layer w7: v1(4620,2094) 4620,2087 4627,2080 4787,2080 4800,2093 v1(4800,2199)
  Bottom Layer w7: U6.40 3779.85,2209.85 3791,2221 3937,2221 4064,2094 v1(4620,2094) ; v1(4800,2199) 4821.5,2177.5 4836,2177.5 4850.43,2163.07 U8.10
DAC_SCLK: U6.21 U8.8 | length 1479.5
  Top Layer w7: v1(4224,2464) 4225,2463 4225,2028 v1(4242.5,2010.5)
  Bottom Layer w7: U6.21 4029.71,2468.9 4040.85,2457.77 4232.23,2457.77 4226,2464 v1(4224,2464) ; v1(4242.5,2010.5) 4266.5,2034.5 4890.5,2034.5 4901.61,2045.61 U8.8
DAC_SDO: U6.22 U8.16 | length 918.1
  Bottom Layer w7: U6.22 3998.6,2447 4033.23,2447 4035.47,2444.77 4199.81,2444.77 4217.58,2427 4844,2427 4876,2395 U8.16@4876,2379
DAC_SYNC: U6.20 U8.7 | length 1531.9
  Top Layer w7: v1(4251,2499) 4251,2477 4286,2442 v1(4286,2003)
  Bottom Layer w7: U6.20 4035.41,2488.59 4046.1,2477.9 4169.01,2477.9 4190.11,2499 v1(4251,2499) ; v1(4286,2003) 4304.5,2021.5 4905.5,2021.5 4927.2,2043.2 U8.7
GND: Boot.2 C1.2 C2.2 C3.1 C4.1 C5.1 C6.2 C7.1 C8.1 C9.1 C10.1 C11.1 C12.1 C13.1 C14.1 C15.1 C16.1 C17.1 C18.1 C19.1 C20.1 C21.1 C22.1 C23.2 C24.1 C25.1 C26.2 C27.2 C28.1 C29.1 C30.2 C32.2 C33.1 C34.1 C35.1 C36.1 C37.1 C38.1 C39.1 C40.1 COMDOWN.3 COMUP.3 Curl.3 CurlSense.3 CX1.1 CX2.1 Lift.3 LiftSense.3 Q2.2 R2.1 R9.2 R10.1 R11.1 R13.1 R15.1 R16.1 R19.1 R20.2 R21.1 R22.2 R23.1 R24.1 R25.1 Reset.2 SWD.5 Swing.3 SwingSense.3 U1.2 U1.6 U2.2 U3.2 U3.5 U4.14 U4.30 U4.32 U4.37 U5.2 U6.12 U6.18 U6.31 U6.47 U6.63 U7.3 U8.1 U8.15 U8.18 U8.19 U8.20 U8.21 U8.25 U9.3 VBus.2 | length 5224.6
  Top Layer w20: U5.2 2619.84,2280 v1(2680,2280) ; v1(2909,2196) 2909,2141 U1.6 ; SWD.5 3025.57,1802 v1(3094,1802) ; U1.2 v1(3300,2710)
  Bottom Layer w7: v1@2715,1815 v1(2720,1810) ; R23.1 R24.1 R25.1 3049.68,2884.32 v1(3057,2877) ; U4.14 v1(3097,3068.68) ; v1(3116,3199) R13.1 C19.1 ; R10.1 3140.2,2835.8 C18.1 3235,2798 3250,2783 3250,2710 ; U4.32 v1(3097,3068.68) ; U4.30 3128.5,3100.18 v1(3097,3068.68) ; C17.1 3450,2710 v1(3460,2720) ; v1(3492,2517) 3492,2517.91 3502.04,2527.96 U6.63 ; v1(3530,2728.9) C8.1 CX1.1 ; v1(3810,2763) 3810,2728.9 3772.2,2691.1 CX2.1 3770,2691.1 3791.11,2669.99 3820,2669.99 3838.9,2651.09 U6.12 ; R9.2 R22.2 R20.2 3960.31,2060.31 v1(3984,2084) ; U7.3@3900,2780.75 U7.3 3926.81,2780.75 3978.66,2728.9 C9.1 ; C14.1 v1(4160,2500) ; U8.15 4850,2360.57 4850,2320 4920,2250 U8.25 ; C20.1 R16.1 5133.2,2932.69 5150.89,2915 v1(5150.89,2907) ; U8.1 5109.75,2110 v1(5170,2110) ; R21.1 5158,2479 v1(5190,2479)
  Bottom Layer w10: v1(3383,2378) 3399.59,2394.59 3399.59,2405.11 3417.48,2423 3446,2423 3459.5,2409.5 3459.5,2390.5 C16.1 ; v1(3642,2224) 3642.05,2223.95 U6.47 ; U6.31 3996.38,2269.27 4024.56,2269.27 4038.73,2255.1 C7.1 v1(4113.9,2255.1) ; U6.18 4132.04,2527.96 v1(4160,2500) ; C38.1 C37.1 4991.19,2478.9 4999.55,2487.26 4999.55,2520.55 5013.53,2534.53 U9.3
  Bottom Layer w15: v1(3390,2550) C13.1 ; v1(3420,2190) 3420,2225.75 C11.1 ; U8.18 U8.19 ; U8.25 4940,2310 4952.8,2322.8 U8.19 ; v1(5050,2480) 5050,2439.63 ; U9.3 5050,2439.63 ; U8.19 U8.20 U8.21 5003.98,2403.98 5012,2412 5032.68,2412 5037.18,2416.5 5037.5,2416.5 5050,2429 5050,2433.5 ; 5050,2433.5 5050,2439.63 ; 5050,2433.5 5050,2439.63
  Bottom Layer w20: v1(2020,2460) 2065.28,2460 C23.2 2066.54,2496.54 2090,2520 C25.1 ; v1(2050,2220) v1@2053.07,2223.07 ; C2.2 v1@2053.07,2223.07 ; C28.1 2060,2230 v1@2053.07,2223.07 ; v1(2319.4,2686.61) 2320.5,2685.51 C6.2 ; v1(2319.4,2816.61) 2382.47,2816.61 2385.94,2813.15 C30.2 2385.94,2863.15 2399.4,2876.61 C3.1 ; v1(2440,1670) 2453.5,1683.5 U3.5 ; v1(2489.4,2606.61) 2492,2609.21 U2.2 ; C40.1 2580,1664.25 v1(2580,1590) ; C29.1 2596.41,2647.72 2611.84,2663.15 C1.2 2652.87,2666.61 v1(2719.4,2666.61) ; U3.2 v1@2715,1815 ; C34.1 2860,2480 v1(2871.73,2491.73) 2883.46,2503.46 C26.2 ; R2.1 3160,2620 3250,2710 v1(3300,2710) ; C21.1 3160,2177.01 v1(3173.23,2190.24) 3186.46,2203.46 C27.2 ; R11.1 C22.1 v1(3850.2,2932.69) ; R15.1@4422.89,2933 v1(4513.89,2933) ; v1(4651.1,2298.9) C35.1@4730,2298.9 ; v1(4670,2180) R19.1 C5.1 ; v1(5170,2110) C4.1 ; C33.1 5288.98,2302.13 5314.41,2302.13 C32.2 5416.54,2276.54 v1(5420,2280) ; Q2.2 v1(5328.58,2131.42)
  Bottom Layer w30: U8.25 v1(5070,2250)
  other v1: 3952.74,2754.82
I2C1_SCL: R3.1 U4.35 U6.58 | length 1270.5
  Top Layer w7: v1(3303,3000) 3303,2874.5 3146.5,2718 v1(3112,2718) 3112,2563.38 3204.17,2471.22 3507.78,2471.22 3518,2461 3518,2441 3496,2419 3497,2418 3499,2420 v1(3501,2420)
  Bottom Layer w7: v1(3112,2718) 3114,2720 R3.1 ; U4.35 3190.56,3021.44 3212,3000 v1(3303,3000) ; v1(3501,2420) 3499,2420 3497,2418 3496,2419 3506.53,2429.53 U6.58
I2C1_SDA: R7.1 U4.34 U6.59 | length 1176.1
  Top Layer w7: v1(3245,3024) 3245,2834.89 3169.11,2759 v1(3109,2759) 3083,2733 3083,2574 3208,2449 3208.22,2449.22 v1(3486.22,2449.22)
  Bottom Layer w7: v1(3109,2759) R7.1 ; U4.34 3195.81,3037.19 3209,3024 v1(3245,3024) ; v1(3486.22,2449.22) U6.59
LED_EN: R13.2 U4.29 U6.61 | length 1098.4
  Top Layer w7: v1(3428.07,3115.93) 3424.07,3115.93 3434,3106 3434,2542 3454,2522 v1(3454,2499)
  Bottom Layer w7: U4.29 3226,3115.93 ; R13.2 3192,3199 3226,3165 3226,3115.93 ; v1(3428.07,3115.93) 3226,3115.93 ; v1(3454,2499) 3464.41,2488.59 U6.61
LiftFB: Lift.2 U8.4 | length 2190.4
  Top Layer w10: Lift.2 3850.11,1629.89 v1(3916,1564) ; v1(5056.63,1564) 5121,1564 5205,1648 5205,1968 v1(5185,1988)
  Bottom Layer w10: v1(3916,1564) v1(5056.63,1564) ; U8.4 5007,2135.98 5007,2018 5037,1988 v1(5185,1988)
LiftRX: Lift.5 U6.17 | length 999.4
  Top Layer w7: Lift.5 3947,1957.38 3947,2258.31 4124,2435.31 4124,2504 v1(4171,2551)
  Bottom Layer w7: U6.17 4167.64,2547.64 v1(4171,2551)
LiftTX: Lift.4 U6.16 | length 1152.8
  Top Layer w7: Lift.4 3968.11,1978.11 4022,2032 4022,2314.93 4207,2499.93 v1(4207,2624)
  Bottom Layer w6: U6.16 4204.62,2626.38 v1(4207,2624)
MCU3V3: C8.2 C11.2 C12.2 C13.2 C14.2 C15.2 FB2.1 R5.2 R6.2 U6.1 U6.19 U6.32 U6.48 U6.64 | length 821.3
  Bottom Layer w7: U6.19 4051.73,2508.27 v1(4060,2500) C14.2
  Bottom Layer w10: v1(3489.62,2576) 3517.97,2547.64 U6.64 ; v1@3996.38,2224.62 U6.32
  Bottom Layer w15: R5.2 3410,2720 3436,2746 3474,2746 3528.9,2691.1 C8.2 v1(3570,2640) 3583.62,2626.38 U6.1 ; R6.2@3458.58,2345.75 C12.2 3458.58,2197.6 FB2.1 3482.18,2174 v1(3522,2174) ; C13.2 3461.26,2547.64 v1(3489.62,2576) ; v1(3591,2175) U6.48@3622.37,2175 ; v1@3996.38,2224.62 v1(3997,2224)
NetBoot_1: Boot.1 R5.1 U6.60 | length 1113.8
  Top Layer w7: Boot.1 3356,1956 v1(3356,2427)
  Bottom Layer w7: v1(3356,2427) 3397.9,2468.9 ; R5.1 3364,2605.1 3364,2502.8 3397.9,2468.9 ; U6.60 3541.31,2471.22 3400.22,2471.22 3397.9,2468.9
NetC6_1: C6.1 R4.1 U2.3 | length 100.3
  Bottom Layer w20: C6.1 R4.1 2442.32,2647.72 U2.3
NetC7_2: C7.2 U6.30 | length 98.7
  Bottom Layer w7: U6.30 4027,2291.74 4040.95,2277.78 4067.89,2277.78 C7.2
NetC9_2: C9.2 FB1.1 U7.1 | length 172
  Bottom Layer w7: U7.1@3937.4,2699.25 3945.55,2691.1 C9.2 4001.1,2691.1 4020,2710 4020,2759.88 FB1.1
NetC10_2: C10.2 U6.13 U7.2 | length 124.8
  Bottom Layer w7: C10.2@3810,2691.1 C10.2 3854.45,2691.1 U7.2@3858.59,2695.24 ; U6.13 U7.2@3858.59,2695.24 ; U7.2@3862.6,2699.25 U7.2@3858.59,2695.24
NetC16_2: C16.2 R6.1 | length 40.5
  Bottom Layer w15: R6.1 3421.1,2388.9 C16.2
NetC31_1: C31.1 Q1.1 R17.1 R18.2 | length 186.5
  Bottom Layer w15: C31.1 5229.69,2176.22 R17.1
  Bottom Layer w20: R17.1 5227.41,2232.28 Q1.1 5249.15,2269.69 R18.2
NetCX1_2: CX1.2 U6.5 Y1.3 | length 136.4
  Bottom Layer w7: CX1.2 3667.99,2691.1 3701.11,2657.99 U6.5
NetCX2_2: CX2.2 U6.6 Y1.1 | length 175.9
  Bottom Layer w7: Y1.1 3740,2716.26 ; U6.6 3720.79,2660.79 3740,2680 3740,2716.26 ; CX2.2@3770,2728.9 3752.64,2728.9 3740,2716.26
NetD1_1: D1.1 U4.36 | length 1559.9
  Top Layer w7: D1.1 3968.28,2499.86 4102,2633.57 v1(4102,2939)
  Bottom Layer w7: U4.36 3173.97,2990.03 3191,2973 3583.77,2973 3705.77,2851 3874,2851 3936,2913 4077,2913 4102,2938 v1(4102,2939)
NetD1_2: D1.2 U4.1 | length 1543
  Top Layer w7: D1.2 4017.5,2503.5 4132,2618 v1(4132,2901)
  Bottom Layer w7: U4.1 3159.99,2978.01 3178,2960 3578.38,2960 3700.38,2838 3919,2838 3981,2900 v1@4130,2900
NetD1_3: D1.3 U4.2 | length 1663.9
  Top Layer w7: D1.3 4089.21,2471.72 4089.21,2539.21 4145,2595 4145,2866 v1(4158,2879)
  Bottom Layer w7: U4.2 3144.24,2970.76 3168,2947 3573,2947 3695,2825 3931,2825 3931,2831.62 3980.38,2881 3982.38,2879 v1(4158,2879)
NetD2_1: D2.1 U4.3 | length 1229.1
  Top Layer w7: v1(3590,2841) 3601,2830 3601,2796.62 3673.62,2724 3889.39,2724 3904.64,2708.75 3904.64,2555.79 3825.28,2476.43 D2.1
  Bottom Layer w7: U4.3 3128.5,2958.5 3155,2932 3540.38,2932 3590,2882.38 v1(3590,2841)
NetD2_2: D2.2 U4.4 | length 1248
  Top Layer w7: v1(3556,2880) 3592.38,2880 3614,2858.38 3614,2802 3630,2786 3845.77,2786 3917.64,2714.13 3917.64,2515.98 D2.2
  Bottom Layer w7: U4.4 3112.75,2954.79 3148.54,2919 3535,2919 3556,2898 v1(3556,2880)
NetD2_3: D2.3 U4.5 | length 1319.5
  Top Layer w7: v1(3641,2811) 3839.16,2811 3934.82,2715.34 3934.82,2460.32 D2.3
  Bottom Layer w7: U4.5 3097,2952.15 3143.15,2906 3468,2906 3563,2811 v1(3641,2811)
NetD3_1: D3.1 U4.6 | length 983.8
  Top Layer w7: v1(3480,2852) 3480,2731.11 3482,2729.11 3482,2729 3530,2681 3580.89,2681 3682.28,2579.61 D3.1
  Bottom Layer w7: U4.6 3081.25,2949.52 3138.77,2892 3443,2892 3483,2852 v1(3480,2852)
NetD3_2: D3.2 U4.7 | length 1015.3
  Top Layer w7: v1(3529,2798) 3529,2769.11 3555.11,2743 3610.62,2743 3731.5,2622.12 D3.2
  Bottom Layer w7: U4.7 3065.5,2946.88 3136.38,2876 3409,2876 3487,2798 v1(3529,2798)
NetD3_3: D3.3 U4.8 | length 1135.3
  Top Layer w7: v1(3571,2771) 3601,2771 3775,2597 3775,2443.5 D3.3
  Bottom Layer w7: U4.8 3049.76,2944.24 3134.3,2859.7 3385.3,2859.7 3474,2771 v1(3571,2771)
NetL1_1: L1.1 U2.5 | length 134.1
  Bottom Layer w20: U2.5 2529.4,2866.61 L1.1
NetQ2_3: Q2.3 R18.1 | length 59
  Bottom Layer w20: R18.1 5301.73,2208.58 Q2.3
NetR1_1: R1.1 R2.2 U1.3 | length 191.2
  Top Layer w20: U1.3 3000,2690 v1(3020,2710)
  Bottom Layer w20: v1(3020,2710) 3050,2710 3080,2680 R1.1 3119.69,2659.68 R2.2
NetR9_1: R9.1 U6.36 | length 75.8
  Bottom Layer w7: U6.36 3858.59,2104.1 R9.1
NetR10_2: R10.2 U4.33 | length 304.9
  Top Layer w7: v1(3212,2833) 3217,2838 v1(3217,3053)
  Bottom Layer w7: U4.33 3216.94,3052.94 v1(3217,3053) ; R10.2 3183,2833 v1(3212,2833)
NetR20_1: R20.1 U6.34 | length 103.3
  Bottom Layer w7: U6.34 3897.96,2139.04 3904,2133 3928,2133 3935,2126 R20.1
NetR21_2: R21.2 U8.22 | length 172.1
  Bottom Layer w7: U8.22 5029.57,2384.84 5044.22,2399.5 5117.87,2399.5 R21.2
NetR22_1: R22.1 U6.35 | length 82.9
  Bottom Layer w7: U6.35 3878.27,2137.73 3900,2116 R22.1
NetR23_2: R23.2 U4.11 | length 156
  Bottom Layer w7: R23.2 2950,2995 2976.44,3021.44 U4.11
NetR24_2: R24.2 U4.10 | length 96.5
  Bottom Layer w7: R24.2 2985,2970.66 U4.10
NetR25_2: R25.2 U4.9 | length 74.2
  Bottom Layer w7: R25.2 3034.01,2938.69 U4.9
NRST: C17.2 Reset.1 SWD.3 U6.7 | length 1909.5
  Top Layer w7: v1(2913,1732) 2913,1739.43 SWD.3 ; v1(3278,1650) 3278,1652 3400,1774 Reset.1 3400,1920 3470,1990 3470,2265.93 3539.06,2334.99 v1(3539.06,2587.01)
  Bottom Layer w7: v1(2913,1732) 2913,1658 2935.5,1635.5 3261.5,1635.5 3276,1650 v1(3278,1650) ; C17.2 3474.96,2651.1 v1(3539.06,2587.01) 3730,2587.01 3740.48,2597.49 U6.7
SWCLK: SWD.4 U6.49 | length 1096.2
  Top Layer w7: v1(2923,2053) 2919,2049 2919,1857.43 SWD.4
  Bottom Layer w7: v1(2923,2053) 2934,2053 2942,2045 3540,2045 3575,2080 3575,2136 3552,2159 3552,2243.99 U6.49
SWDIO: SWD.2 U6.46 | length 1141.7
  Top Layer w7: v1(2855,2042) 2906,1991 2906,1832.43 SWD.2
  Bottom Layer w7: v1(2855,2042) 2865,2032 2912.89,2032 2913.89,2031 2932.11,2031 2933.11,2032 3575,2032 3661.74,2118.74 U6.46
SwingFB: Swing.2 U8.23 | length 1594.5
  Top Layer w10: Swing.2 4500.11,1649.89 v1(4555,1595) ; v1@5020,1594 5128.37,1594 5188.61,1654.24 5188.61,1934.39 5096,2027 5096,2272 v1(5065,2303)
  Bottom Layer w10: v1(4555,1595) 5021,1595 v1(5023,1593) ; U8.23 5055.16,2312.84 v1(5065,2303)
SwingRX: Swing.5 U6.38 | length 998.4
  Top Layer w7: v1(3792.5,1930.93) 3783,1940.43 3783,2091 v1(3815,2123)
  Bottom Layer w7: v1(3792.5,1930.93) 3794.43,1929 4431.6,1929 Swing.5 ; v1(3815,2123) 3819.22,2127.22 U6.38
SwingTX: Swing.4 U6.37 | length 1125.7
  Top Layer w7: v1(3814,1971) 3814,2085 3817,2082 v1(3817,2078)
  Bottom Layer w7: v1(3814,1971) 3814,1949 3821,1942 4598,1942 4618.11,1921.89 Swing.4 ; v1(3817,2078) 3817,2092 3838.9,2113.9 U6.37
SWO/TDO: SWD.6 U6.55 | length 1114.7
  Top Layer w7: SWD.6 3000,1833 3045,1878 3045,2338 v1(3069,2362)
  Bottom Layer w7: v1(3069,2362) 3326,2362 3407,2443 3461,2443 3464,2440 3464,2439.89 3474,2429.89 3474,2411.61 3481.11,2404.49 3481.11,2401.77 3512.41,2370.48 U6.55
USART1_RTS: U3.3 U6.45 | length 1506.2
  Top Layer w10: v1(3483,1667) 3483,1873 3682,2072 v1(3682,2090)
  Bottom Layer w10: U3.3 2705,1765 2760,1710 2760,1673 2812,1621 3437,1621 v1(3483,1667) ; U6.45 3682,2173.05 v1(3682,2090)
USART1_RX: U3.1 U6.43 | length 1780.8
  Top Layer w10: v1@3516,1641 3516,1865.9 3711,2060.9 v1(3711,2114.5)
  Bottom Layer w10: U3.1 2615,1865 2610,1860 2610,1763.44 2635.44,1738 2709.37,1738 2744,1703.37 2744,1666.37 2805.37,1605 3479,1605 v1(3514,1640) 3515,1640 v1@3516,1641 ; v1(3711,2114.5) 3711,2119 3720.79,2128.79 U6.43
USART1_TX: U3.4 U6.42 | length 1623.1
  Top Layer w10: v1(3544,1621) 3544,1871.27 v1(3740.25,2067.52)
  Bottom Layer w10: U3.4 2666.5,1636.5 2714,1589 3512,1589 v1(3544,1621) ; v1(3740.25,2067.52) 3740.48,2067.52 U6.42
VBus: C21.2 C23.1 C25.2 C27.1 Curl.1 Lift.1 Swing.1 U1.1 U5.1 VBus.1 | length 6078.2
  Top Layer w20: v1(2180,2490) U5.1 ; v1(2709,2258) 2709,2519 v1(2710,2520) ; v1(3125,2258) 3125,1538 v1(3154,1509) ; v1(3300,2090) U1.1 ; v1(3909,1509) 3968.11,1568.11 Lift.1 ; v1(4559,1509) 4618.11,1568.11 Swing.1 ; v1(5209,1509) 5268.11,1568.11 Curl.1
  Bottom Layer w20: VBus.1 1928.81,2570 2138,2570 ; C23.1 2171.26,2461.26 2180,2470 v1(2180,2490) 2180,2504 2164,2520 C25.2 2138.9,2569.1 2138,2570 ; v1(2709,2258) v1(3125,2258) 3125,2129 3131.8,2122.2 C21.2 3192.2,2090 3240,2090 ; v1(2710,2520) 2660,2570 2138,2570 ; v1(3154,1509) v1(3909,1509) v1(4559,1509) v1(5209,1509) ; C27.1 3220,2110 3240,2090 ; v1(3300,2090) 3240,2090
VCurlSense: CurlSense.1 R14.2 | length 117.6
  Bottom Layer w6: R14.2 CurlSense.1
VLiftSense: LiftSense.1 R8.2 | length 120.2
  Bottom Layer w7: R8.2 LiftSense.1
  Bottom Layer w20: LiftSense.1@3730,3048.36 LiftSense.1
VREF2V5: C37.2 C38.2 U8.17 U9.2 | length 176.8
  Bottom Layer w10: U8.17 4901.61,2408.27 4933.66,2440.32 4999.88,2440.32 U9.2
VSwingSense: R12.2 SwingSense.1 | length 123.3
  Bottom Layer w7: R12.2@4381.89,2927 R12.2 SwingSense.1
pads on no net: COMDOWN.None COMUP.None Curl.6 Curl.None CurlSense.None Lift.6 Lift.None LiftSense.None SWD.A SWD.B SWD.C SWD.D SWD.E SWD.F SWD.G Swing.6 Swing.None SwingSense.None U1.5 U4.12 U4.13 U4.15 U4.16 U4.17 U4.18 U4.19 U4.20 U4.21 U4.22 U4.23 U4.24 U4.25 U4.26 U4.27 U4.28 U6.2 U6.3 U6.4 U6.8 U6.14 U6.15 U6.24 U6.25 U6.33 U6.41 U6.44 U6.50 U6.51 U6.52 U6.53 U6.54 U6.56 U6.57 U6.62 U8.2 U8.6 U8.12 U8.13 VBus.None Y1.2 Y1.4

## Polygon pours and split planes (outlines as drawn)
GND on Internal Plane 1 (split plane): 5479.9,1320.1 1520.1,1320.1 1520.1,3479.9 5479.9,3479.9
MCU3V3 on Internal Plane 2 (split plane): 4084.9,2151.16 3445.1,2151.16 3445.1,2664.9 4084.9,2664.9
3V3 on Internal Plane 2 (split plane): 5479.9,1320.1 1520.1,1320.1 1520.1,3479.9 5479.9,3479.9

## Other copper
Internal Plane 2 (plane layer: these items are gaps in the copper):
  lines w10: 3440,2146.07 4090,2146.07 4090,2670 3440,2670 3440,2146.07

## Silkscreen, mask and mechanical layers (free items; w line width, h text height)
Top Overlay:
  text "Dance, dance, otherwise we are lost." at 1792,1390 h40
Mechanical 1:
  circle w0.5: c1650,1450.25 r60
  circle w0.5: c1650,3350.25 r60
  circle w0.5: c5350,1450.25 r60
  circle w0.5: c5350,3350.25 r60
  circle w0.5: c4381.89,3050.25 r20
  circle w0.5: c3968.11,1742.38 r20
  circle w0.5: c5031.89,3050.25 r20
  circle w0.5: c2159.06,1742.38 r20
  circle w0.5: c1700,2341.19 r20
  circle w0.5: c2040.94,3058.12 r20
  circle w0.5: c5268.11,1742.38 r20
  circle w0.5: c4618.11,1742.38 r20
  circle w0.5: c3731.89,3050.25 r20
  lines w0.5: 1500,1300.25 5500,1300.25 5500,3500.25 1500,3500.25 1500,1300.25

## Text inside footprints (layer, text, board x,y; h text height)
U5: Mechanical 13 "*" at 2362.5,2502.5 h50 r270
U8: Mechanical 13 "*" at 5042.5,2164 h50 r270